# Altium PCB LOAD CONTROL_Final2.PcbDoc (part 1 of 2)
Units mil, origin at the board's own origin, x right, y up, seen from the top; angles counter-clockwise.
Board outline 2032.89 x 4209.34 mil, 2 copper layers (Top Layer, Bottom Layer); 80 components, 51 nets, 252 pads, 95 vias.
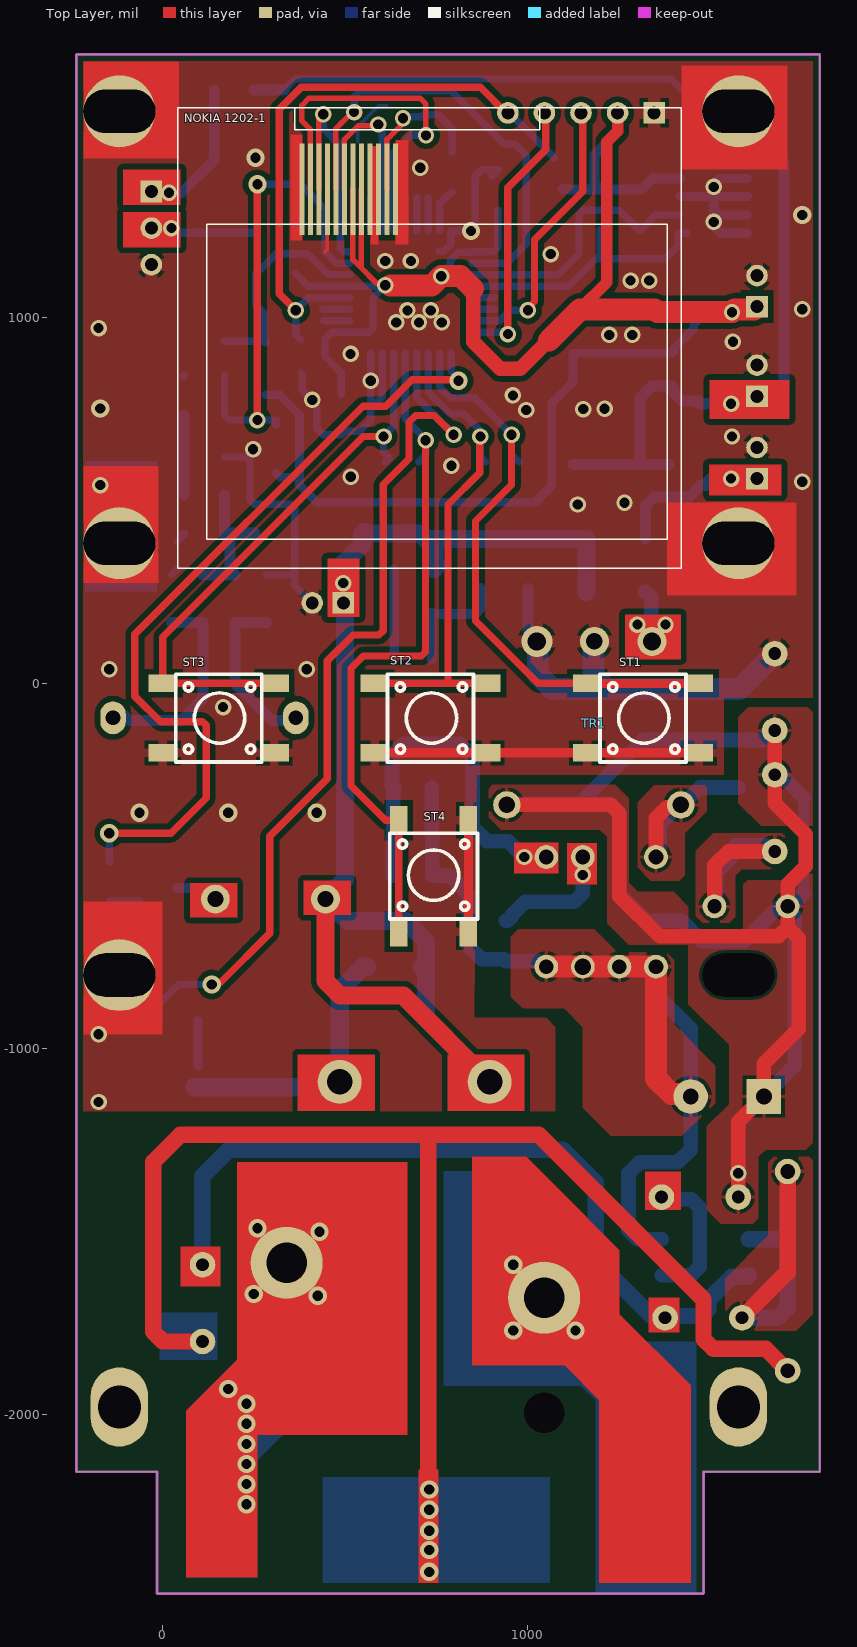
[diagram p0: Top Layer view]
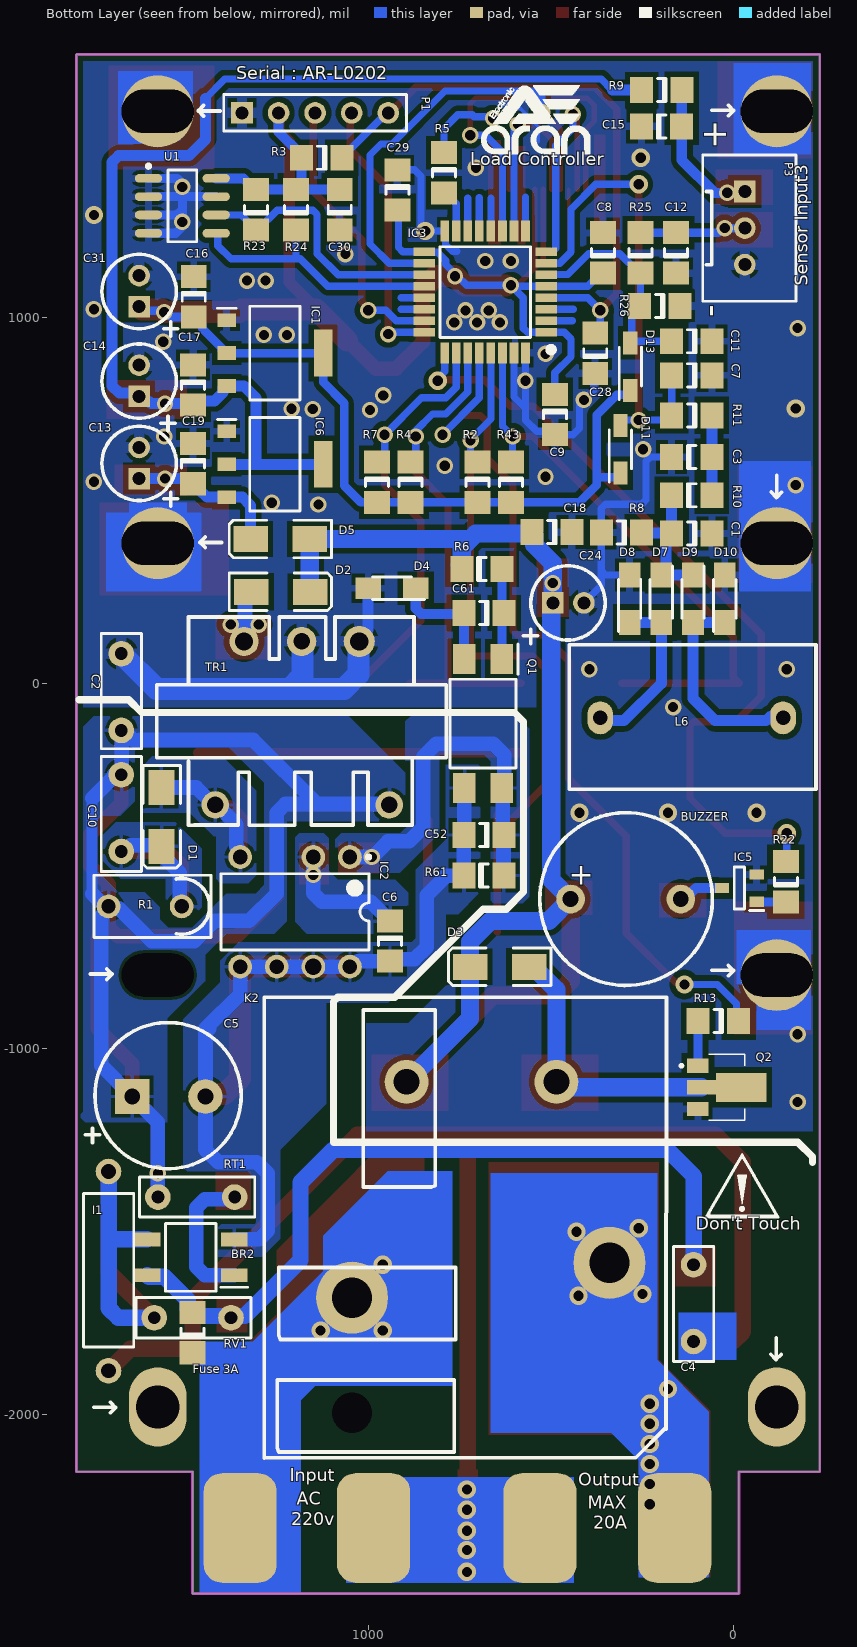
[diagram p1: Bottom Layer view, seen from below]
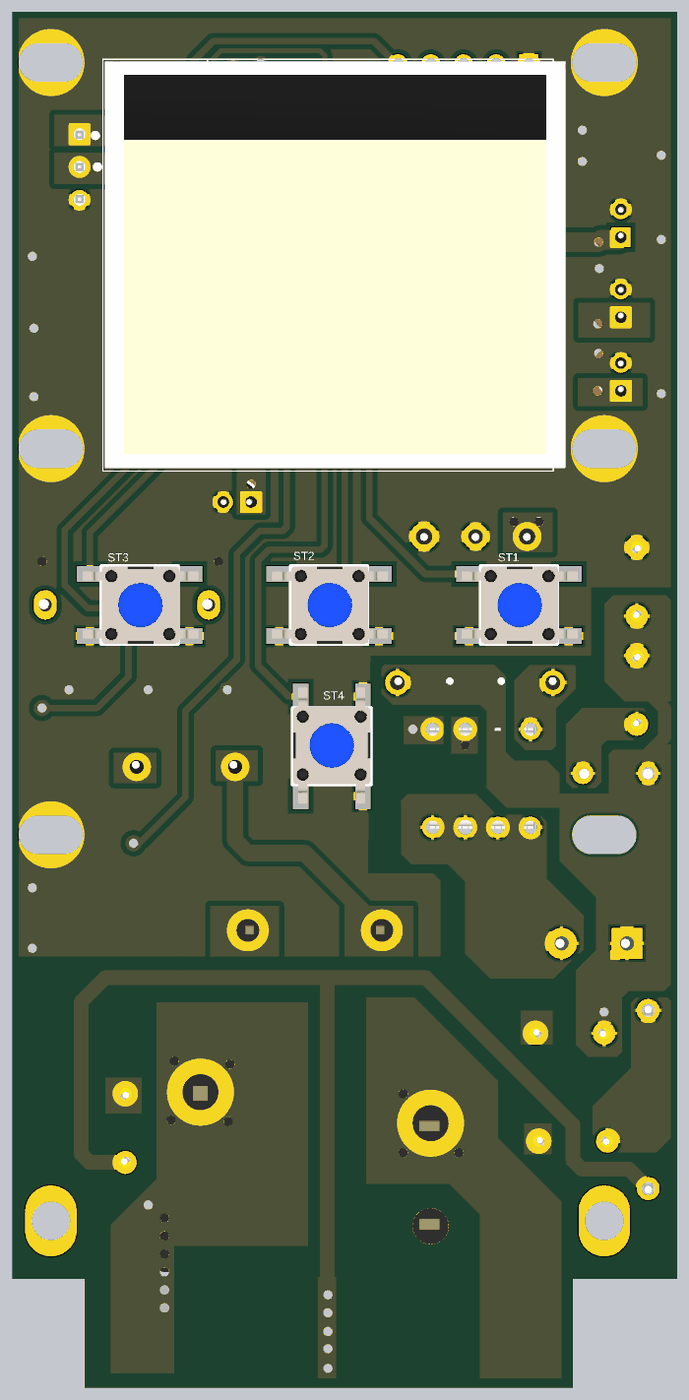
[diagram p2: 3D render of the assembled board from above, using the file's embedded part models]
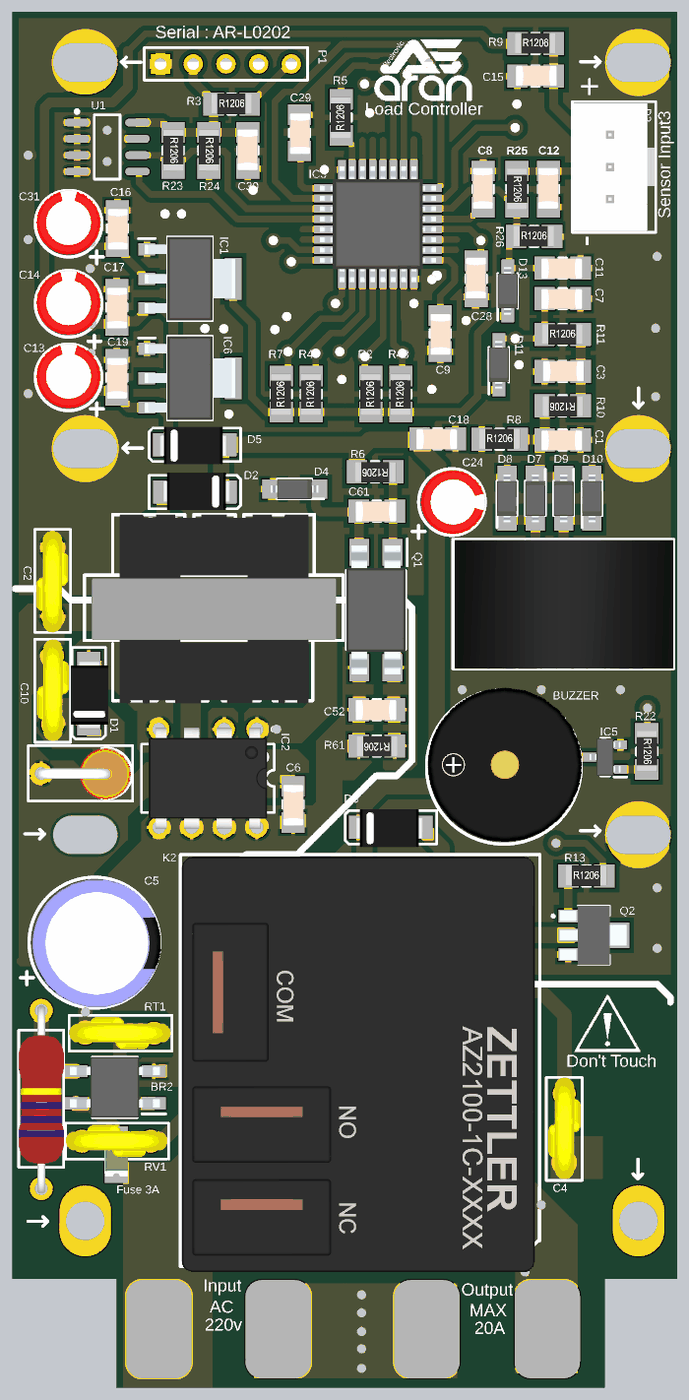
[diagram p3: 3D render of the assembled board from below, using the file's embedded part models]

## Layer stack, top to bottom
Top Solder: solder mask 0.4, Solder Resist, Dk 3.5
Top Layer: signal copper 1.4
Dielectric 1: dielectric 12.6, FR-4, Dk 4.8
Bottom Layer: signal copper 1.4
Bottom Solder: solder mask 0.4, Solder Resist, Dk 3.5

## Board outline
-14.09,-2489.41 -14.09,-2156.29 -235,-2156.29 -235,1719.93 1797.89,1719.93 1797.89,-2156.29 1480,-2156.29 1480,-2489.41

## Design rules (kind name [scope] priority, off if disabled: settings)
Clearance Clearance_15 [InNamedPolygon('GND_L02_P008')] p1: gap=15 ignorepadtopadclearanceinfootprint=TRUE
Clearance Clearance_14 [InNamedPolygon('GND_L01_P006')] p2: gap=15 ignorepadtopadclearanceinfootprint=TRUE
Clearance Clearance_13 [InNamedPolygon('GND_L01_P006')] p3: gap=15 ignorepadtopadclearanceinfootprint=TRUE
Clearance Clearance_12 [InNamedPolygon('GND_L01_P006')] p4: gap=7.87 ignorepadtopadclearanceinfootprint=FALSE
Clearance Clearance_11 [InNamedPolygon('GND_L01_P006')] p5: gap=10 ignorepadtopadclearanceinfootprint=FALSE except(0: Arc-Hole Track-Hole SMDPad-Hole THPad-Hole Via-Hole Fill-Hole Poly-Hole Region-Hole Text-Hole)
Clearance Clearance_10 [InNamedPolygon('GND_L02_P008')] p6: gap=19.68 ignorepadtopadclearanceinfootprint=FALSE
Clearance Clearance_9 [InNamedPolygon('GND_L01_P006')] p7: gap=19.68 ignorepadtopadclearanceinfootprint=FALSE
Clearance Clearance_8 [InNamedPolygon('GND_L01_P006')] p8: gap=10 ignorepadtopadclearanceinfootprint=FALSE except(0: Arc-Hole Track-Hole SMDPad-Hole THPad-Hole Via-Hole Fill-Hole Poly-Hole Region-Hole Text-Hole)
Clearance Clearance_7 [InNamedPolygon('GND_L01_P006')] p9: gap=19.68 ignorepadtopadclearanceinfootprint=FALSE
Clearance Clearance_6 [InNamedPolygon('GND_L01_P006')] p10: gap=10 ignorepadtopadclearanceinfootprint=FALSE except(0: Arc-Hole Track-Hole SMDPad-Hole THPad-Hole Via-Hole Fill-Hole Poly-Hole Region-Hole Text-Hole)
Clearance 0 [InNamedPolygon('GND_L01_P006')] p11: gap=10 ignorepadtopadclearanceinfootprint=FALSE except(0: Arc-Hole Track-Hole SMDPad-Hole THPad-Hole Via-Hole Fill-Hole Poly-Hole Region-Hole Text-Hole)
Clearance Clearance_5 [InNamedPolygon('GND_L01_P006')] p12: gap=10 ignorepadtopadclearanceinfootprint=FALSE except(0: Arc-Hole Track-Hole SMDPad-Hole THPad-Hole Via-Hole Fill-Hole Poly-Hole Region-Hole Text-Hole)
Clearance Clearance_4 [InNamedPolygon('GND-E_L02_P002')] p13: gap=20 ignorepadtopadclearanceinfootprint=FALSE
Clearance Clearance_3 [InNamedPolygon('GND_L01_P001')] p14: gap=25 ignorepadtopadclearanceinfootprint=FALSE
Clearance Clearance_2 [InNamedPolygon('GND_L02_P000')] p15: gap=20 ignorepadtopadclearanceinfootprint=FALSE
Clearance Clearance_1 [InNamedPolygon('Bottom Layer-GND')] p16: gap=14 ignorepadtopadclearanceinfootprint=FALSE
Clearance [All] p17: gap=8 ignorepadtopadclearanceinfootprint=FALSE
PolygonConnect PolygonConnect_14 [All vs IsNamedPolygon('GND_L02_P008')] p1: thpad.connectstyle=Relief thpad.reliefconductorwidth=30 thpad.reliefentries=4 thpad.polygonreliefangle="90 Angle" thpad.airgapwidth=10 smdpad.connectstyle=Relief smdpad.reliefconductorwidth=20 smdpad.reliefentries=4 smdpad.polygonreliefangle="90 Angle" smdpad.airgapwidth=10 via.connectstyle=Direct via.reliefconductorwidth=10 via.reliefentries=4 via.polygonreliefangle="90 Angle" via.airgapwidth=10
PolygonConnect PolygonConnect_13 [All vs IsNamedPolygon('GND_L01_P006')] p2: thpad.connectstyle=Relief thpad.reliefconductorwidth=35 thpad.reliefentries=4 thpad.polygonreliefangle="90 Angle" thpad.airgapwidth=10 smdpad.connectstyle=Relief smdpad.reliefconductorwidth=25 smdpad.reliefentries=4 smdpad.polygonreliefangle="90 Angle" smdpad.airgapwidth=10 via.connectstyle=Direct via.reliefconductorwidth=10 via.reliefentries=4 via.polygonreliefangle="90 Angle" via.airgapwidth=10
PolygonConnect PolygonConnect_12 [All vs IsNamedPolygon('GND_L01_P006')] p3: thpad.connectstyle=Relief thpad.reliefconductorwidth=35 thpad.reliefentries=4 thpad.polygonreliefangle="90 Angle" thpad.airgapwidth=10 smdpad.connectstyle=Relief smdpad.reliefconductorwidth=20 smdpad.reliefentries=4 smdpad.polygonreliefangle="90 Angle" smdpad.airgapwidth=10 via.connectstyle=Direct via.reliefconductorwidth=10 via.reliefentries=4 via.polygonreliefangle="90 Angle" via.airgapwidth=10
PolygonConnect PolygonConnect_11 [All vs IsNamedPolygon('GND_L01_P006')] p4: thpad.connectstyle=Relief thpad.reliefconductorwidth=20 thpad.reliefentries=4 thpad.polygonreliefangle="90 Angle" thpad.airgapwidth=10 smdpad.connectstyle=Relief smdpad.reliefconductorwidth=20 smdpad.reliefentries=4 smdpad.polygonreliefangle="90 Angle" smdpad.airgapwidth=10 via.connectstyle=Direct via.reliefconductorwidth=10 via.reliefentries=4 via.polygonreliefangle="90 Angle" via.airgapwidth=10
PolygonConnect PolygonConnect_10 [All vs IsNamedPolygon('GND_L01_P006')] p5: thpad.connectstyle=Relief thpad.reliefconductorwidth=10 thpad.reliefentries=4 thpad.polygonreliefangle="90 Angle" thpad.airgapwidth=10 smdpad.connectstyle=Relief smdpad.reliefconductorwidth=10 smdpad.reliefentries=4 smdpad.polygonreliefangle="90 Angle" smdpad.airgapwidth=10 via.connectstyle=Direct via.reliefconductorwidth=10 via.reliefentries=4 via.polygonreliefangle="90 Angle" via.airgapwidth=10
PolygonConnect PolygonConnect_9 [All vs IsNamedPolygon('GND_L01_P006')] p6: thpad.connectstyle=Direct thpad.reliefconductorwidth=10 thpad.reliefentries=4 thpad.polygonreliefangle="90 Angle" thpad.airgapwidth=10 smdpad.connectstyle=Relief smdpad.reliefconductorwidth=10 smdpad.reliefentries=4 smdpad.polygonreliefangle="90 Angle" smdpad.airgapwidth=10 via.connectstyle=Relief via.reliefconductorwidth=10 via.reliefentries=4 via.polygonreliefangle="90 Angle" via.airgapwidth=10
PolygonConnect PolygonConnect_8 [All vs IsNamedPolygon('GND_L01_P006')] p7: connectstyle=Relief reliefconductorwidth=10 reliefentries=4 polygonreliefangle="90 Angle" airgapwidth=10
PolygonConnect PolygonConnect_7 [All vs IsNamedPolygon('GND_L02_P008')] p8: connectstyle=Relief reliefconductorwidth=10 reliefentries=4 polygonreliefangle="90 Angle" airgapwidth=10
PolygonConnect PolygonConnect_6 [All vs IsNamedPolygon('GND_L02_P008')] p9: connectstyle=Direct reliefconductorwidth=10 reliefentries=4 polygonreliefangle="90 Angle" airgapwidth=10
PolygonConnect PolygonConnect_5 [All vs IsNamedPolygon('GND_L02_P008')] p10: thpad.connectstyle=Direct thpad.reliefconductorwidth=10 thpad.reliefentries=4 thpad.polygonreliefangle="90 Angle" thpad.airgapwidth=10 smdpad.connectstyle=Relief smdpad.reliefconductorwidth=10 smdpad.reliefentries=4 smdpad.polygonreliefangle="90 Angle" smdpad.airgapwidth=10 via.connectstyle=Relief via.reliefconductorwidth=10 via.reliefentries=4 via.polygonreliefangle="90 Angle" via.airgapwidth=10
PolygonConnect PolygonConnect_4 [All vs IsNamedPolygon('GND-E_L02_P002')] p11: thpad.connectstyle=Relief thpad.reliefconductorwidth=25 thpad.reliefentries=4 thpad.polygonreliefangle="90 Angle" thpad.airgapwidth=10 smdpad.connectstyle=Relief smdpad.reliefconductorwidth=15 smdpad.reliefentries=4 smdpad.polygonreliefangle="90 Angle" smdpad.airgapwidth=10 via.connectstyle=Direct via.reliefconductorwidth=10 via.reliefentries=4 via.polygonreliefangle="90 Angle" via.airgapwidth=10
PolygonConnect PolygonConnect_3 [All vs IsNamedPolygon('GND_L01_P001')] p12: thpad.connectstyle=Relief thpad.reliefconductorwidth=25 thpad.reliefentries=4 thpad.polygonreliefangle="90 Angle" thpad.airgapwidth=10 smdpad.connectstyle=Relief smdpad.reliefconductorwidth=25 smdpad.reliefentries=4 smdpad.polygonreliefangle="90 Angle" smdpad.airgapwidth=10 via.connectstyle=Direct via.reliefconductorwidth=10 via.reliefentries=4 via.polygonreliefangle="90 Angle" via.airgapwidth=10
PolygonConnect PolygonConnect_2 [All vs IsNamedPolygon('GND_L02_P000')] p13: thpad.connectstyle=Relief thpad.reliefconductorwidth=25 thpad.reliefentries=4 thpad.polygonreliefangle="90 Angle" thpad.airgapwidth=10 smdpad.connectstyle=Relief smdpad.reliefconductorwidth=10 smdpad.reliefentries=4 smdpad.polygonreliefangle="90 Angle" smdpad.airgapwidth=15 via.connectstyle=Direct via.reliefconductorwidth=10 via.reliefentries=4 via.polygonreliefangle="90 Angle" via.airgapwidth=10
PolygonConnect PolygonConnect_1 [All vs IsNamedPolygon('Bottom Layer-GND')] p14: thpad.connectstyle=Relief thpad.reliefconductorwidth=25 thpad.reliefentries=4 thpad.polygonreliefangle="90 Angle" thpad.airgapwidth=10 smdpad.connectstyle=Relief smdpad.reliefconductorwidth=15 smdpad.reliefentries=4 smdpad.polygonreliefangle="90 Angle" smdpad.airgapwidth=10 via.connectstyle=Direct via.reliefconductorwidth=10 via.reliefentries=4 via.polygonreliefangle="90 Angle" via.airgapwidth=10
PolygonConnect [All] p15: connectstyle=Relief reliefconductorwidth=10 reliefentries=4 polygonreliefangle="90 Angle" airgapwidth=10
RoutingVias [All] p1: holewidth=28 width=50 viastyle="Through Hole" minholewidth=28 minwidth=50 maxholewidth=28 maxwidth=50
SolderMaskExpansion [All] p1: expansion=4
Width [All] p1: maxlimit=100 minlimit=10 preferedwidth=10
30 further rules are at their usual default settings.

## Classes and differential pairs
polygon class PolygonClass_1: GND_L01_P006

## Components (designator, comment, footprint, x,y, rotation, side; value= is the part's Value field where it differs from the comment)
BR2 "HD06-T" SOP250P700X270-4N 1485,-1570 r0 bottom
BUZZER "Buzzer" BUZZER 301.5,-593.63 r90 bottom (schematic designator Buzzer)
C1 "100nf" C1206 117.6,407.66 r270 bottom value=10PF
C2 "2.3nf" "VAR 5MM" 1675,1.18 r180 bottom value=100pF
C3 "100nf" C1206 112.16,621.43 r90 bottom value=10PF
C4 "2.3nf" "VAR 5MM" 110,-1720 r0 bottom value=100pF
C5 "400V" "RADIAL 12MM" 1540,-1125 r90 bottom value=10uF
C6 "100nf" C1206 937.66,-707.6 r180 bottom value=10PF
C7 "100nf" C1206 117.6,840 r270 bottom value=10PF
C8 "100nf" C1206 360,1180 r0 bottom value=10PF
C9 "100nf" C1206 487,732.64 r180 bottom value=10PF
C10 "2.3nf" "VAR 5MM" 1675,-380 r0 bottom value=100pF
C11 "100nf" C1206 117.6,933.12 r270 bottom value=10PF
C12 "100nf" C1206 160,1180 r0 bottom value=10PF
C13 "35v - 100uf" "RADIAL 5MM" 1626.28,600 r270 bottom value=1500uF
C14 "35v - 100uf" "RADIAL 5MM" 1626.28,825 r270 bottom value=1500uF
C15 "100nf" C1206 195,1525 r90 bottom value=10PF
C16 "100NF" C1206 1474.54,1054.25 r180 bottom value=10PF
C17 "100NF" C1206 1476.87,812.99 r180 bottom value=10PF
C18 "100NF" C1206 500.12,411.33 r270 bottom value=10PF
C19 "100NF" C1206 1476.71,598.21 r180 bottom value=10PF
C24 "16v - 470uf" "RADIAL 5MM" 455,220 r0 bottom value=1500uF
C28 "100nf" C1206 381.35,905.51 r0 bottom value=10PF
C29 "100nf" C1206 917.13,1346.52 r180 bottom value=10PF
C30 "100nf" C1206 1080,1298.04 r0 bottom value=10PF
C31 "35v - 100uf" "RADIAL 5MM" 1626.28,1070 r270 bottom value=1500uF
C52 "1nF" C1206 685.98,-417.4 r270 bottom value=10PF
C61 "100nf" C1206 685.98,190 r270 bottom value=10PF
D1 "4007" SMA 1565,-365 r180 bottom
D2 "4007" SMA 1240,250 r90 bottom
D3 "4007" SMA 640,-775 r270 bottom
D4 "zener 11v" SOD3716X135N#1 935,260 r0 bottom
D5 "4007" SMA 1240,395 r270 bottom
D7 "1N4148W-E3-08" SOD3716X135N#1 198.33,231.18 r270 bottom
D8 "1N4148W-E3-08" SOD3716X135N#1 285,231.18 r90 bottom
D9 "1N4148W-E3-08" SOD3716X135N#1 111.67,231.18 r270 bottom
D10 "1N4148W-E3-08" SOD3716X135N#1 25,231.18 r90 bottom
D11 "1N4148W-E3-08" SOD3716X135N#2 310,640 r90 bottom
D13 "1N4148W-E3-08" SOD3716X135N#2 282.88,865.89 r90 bottom
"Fuse 3A" "Fuse 1" FUSE1206 1477.5,-1775 r180 bottom
IC1 "AMS1117-3.3V" SOT229P700X180-4N 1255,903.15 r180 bottom
IC2 "TNY176PN" DIP8 1200,-625 r270 bottom
IC3 "STM32F030K6T6TR" QFP80P900X900X160-32N 680,1070 r0 bottom
IC5 "MMBT3906" SOT95P240X120-3N -15,-560 r0 bottom
IC6 "AMS1117-5V" SOT229P700X180-4N 1255,599.1 r180 bottom
K2 "RELAY-SPDT" T91 1060,-1555 r0 bottom
l1 "1mH" "inductor 0.25w" 1710,-1650 r180 bottom value=10mH (schematic designator L1)
L6 "0" ZMC 110.24,-94.49 r0 bottom value=300uH
"NOKIA 1202-1" "LCD2" "LCD NOKIA 1202" 737.49,944.11 r0 top
P1 "Header 5" HDR1X5 1345,1560.09 r180 bottom
P3 "Header 3" 3PIN -30,1245 r270 bottom
Q1 "TPC817S1A_RAG" SOP259P1005X368-4N 685.98,-110 r270 bottom
Q2 "2SC2873-Y_F_" 2SC5819TE12LF 68.58,-1105 r270 bottom
R1 "0.22 oh _ 5%" "RES 2W H" 1390,-625 r270 bottom value=0.22oh
R2 "Res Semi" R1206 698.77,547.44 r180 bottom value=2.2K
R3 "Res Semi" R1206 1130,1435 r270 bottom value=1k
R4 "Res Semi" R1206 881.64,547.44 r180 bottom value=2.2K
R5 "Res Semi" R1206 790.24,1393.73 r180 bottom value=1k
R6 "1206" R1206 685.98,315 r90 bottom value=100
R7 "Res Semi" R1206 973.08,547.44 r180 bottom value=2.2K
R8 "Res Semi" R1206 310,410 r270 bottom value=100
R9 "Res Semi" R1206 200,1620 r270 bottom value=3.3k
R10 "Res Semi" R1206 112.16,516.68 r90 bottom value=1k
R11 "Res Semi" R1206 117.6,730.3 r270 bottom value=1k
R13 "Res Semi" R1206 45,-926 r270 bottom value=1k
R22 "Res Semi" R1206 -140,-540 r0 bottom value=1k
R23 "Res Semi" R1206 1308.99,1298.04 r0 bottom value=1k
R24 "Res Semi" R1206 1199.91,1298.04 r0 bottom value=1k
R25 "Res Semi" R1206 257.34,1180 r0 bottom value=3.3k
R26 "Res Semi" R1206 205,1030 r270 bottom value=3.3k
R43 "Res Semi" R1206 607.33,547.44 r180 bottom value=2.2K
R61 "330k" R1206 680.54,-523.33 r90 bottom value=10K
RT1 "5D-9" "VAR 5MM" 1445,-1405 r270 bottom value=150k
RV1 "VDR - 14D561k" "VAR 5MM" 1455,-1735 r270 bottom
ST1 "SW-PB" "PUSH BOTTOM 6*6" 1316.95,-90 r90 top
ST2 "SW-PB" "PUSH BOTTOM 6*6" 735.98,-90 r90 top
ST3 "SW-PB" "PUSH BOTTOM 6*6" 156.44,-90 r90 top
ST4 "SW-PB" "PUSH BOTTOM 6*6" 736.87,-524.69 r180 top
TR1 "Trans 15 D 16" EE20 1222.39,-92.39 r0 top
U1 "Serial EEPROM(24C04)" SO8_L 1508.17,1305.9 r180 bottom

## Footprints (in the part's own frame and the unit in brackets; to place one, negate y for a bottom-side part, rotate by r counter-clockwise, add the part's x,y. Pads: shape width x height; smd on the part's side, far side on the other; paste and mask are expansions set on the pad)
2SC5819TE12LF [mm]
  rect 1x1.5 smd: 1(-1.5,-0.75) 3(1.5,-0.75)
  rect 1x2 smd: 2(0,-0.5)
  rect 2x3.5 smd: 4(0,2.25)
  silkscreen extent -2.3,-2 2.3,2.5, body extent -2.3,-1.4 2.3,3.8, height 1.1
3PIN [mm]
  rect 1.5x1.5 hole 0.9: 1(-2.54,0)
  round 1.5 hole 0.9: 2(0,0) 3(2.54,0)
  silkscreen extent -5.08,-2.92 5.08,3.56, body extent -4.95,-2.9 4.95,3.49, height 7
BUZZER [mm]
  round 2 hole 1.1: 1(0.092,3.675) 2(0.092,-3.975)
  silkscreen extent -5.91,-6.17 6.09,5.83, body extent -5.75,-6.25 6.25,5.75, height 9.5
C1206 [mm]
  rect 1.8x1.6 smd: 1(-0.059,1.469) 2(-0.059,-1.331)
  silkscreen extent -0.86,-0.23 0.74,0.37, body extent -0.83,-1.59 0.77,1.61, height 0.81
DIP8 [mil]
  round 65 hole 40: 1(-150,150) 2(-150,50) 4(-150,-150) 5(150,-150) 6(150,-50) 8(150,150)
  round 65 hole 45: 7(150,50)
  silkscreen extent -155,-203 104,206, body extent -155,-181 155,181, height 152
EE20 [mil]
  round 75 hole 45: 1(195.62,-240) 4(-280,-240)
  round 85 hole 50: 5(-198.08,207.01)
  round 80 hole 45: 6(-40.6,207.01)
  round 80 hole 50: 7(116.88,207.01)
  body extent -415,-304 333,274, height 104
FUSE1206 [mm]
  rect 1.8x1.6 smd: 1(-0.077,-1.416) 2(-0.077,1.384)
  silkscreen extent -0.88,-0.32 0.72,0.28, body extent -0.99,-1.74 0.85,1.76, height 0.5
HDR1X5 [mm] "Connector; Header; 5 Position"
  rect 1.5x1.5 hole 0.9: 1(0,0)
  round 1.5 hole 0.9: 2(2.54,0) 3(5.08,0) 4(7.62,0) 5(10.16,0)
  silkscreen extent -1.27,-1.27 11.43,1.27
"inductor 0.25w" [mil]
  round 70 hole 40: 1(0,-230) 2(0,315)
  silkscreen extent -69,-165 69,255, body extent -69,-245 69,330, height 89
"LCD NOKIA 1202" [mm]
  rect 0.35x6.35 smd: 1(-9.039,10.344) 2(-8.448,10.344) 3(-7.857,10.344) 4(-7.267,10.344) 5(-6.676,10.344) 6(-6.085,10.344) 7(-5.494,10.344) 8(-4.903,10.344) 9(-4.312,10.344) 10(-3.721,10.344) 11(-3.13,10.344) 12(-2.539,10.344)
  silkscreen extent -17.68,-15.99 17.32,16.01, body extent -17.52,-15.75 18.28,15.85, height 2.51
"PUSH BOTTOM 6*6" [mm]
  rect 1.2x2 smd: 1(-2.54,3.937) 1(-2.54,-3.81) 2(2.286,-3.81) 2(2.286,3.937)
  silkscreen extent -3.18,-2.92 2.92,3.05, body extent -3.13,-4.5 2.87,4.5, height 4.2
QFP80P900X900X160-32N [mm]
  rect 1.475x0.6 smd: 1(-4.238,2.8) 2(-4.238,2) 3(-4.238,1.2) 4(-4.238,0.4) 5(-4.238,-0.4) 6(-4.238,-1.2) 7(-4.238,-2) 8(-4.238,-2.8) 17(4.238,-2.8) 18(4.238,-2) 19(4.238,-1.2) 20(4.238,-0.4) 21(4.238,0.4) 22(4.238,1.2) 23(4.238,2) 24(4.238,2.8)
  rect 0.6x1.475 smd: 9(-2.8,-4.238) 10(-2,-4.238) 11(-1.2,-4.238) 12(-0.4,-4.238) 13(0.4,-4.238) 14(1.2,-4.238) 15(2,-4.238) 16(2.8,-4.238) 25(2.8,4.238) 26(2,4.238) 27(1.2,4.238) 28(0.4,4.238) 29(-0.4,4.238) 30(-1.2,4.238) 31(-2,4.238) 32(-2.8,4.238)
  silkscreen extent -4.77,-3.15 3.15,4.2, body extent -4.5,-4.5 4.5,4.5, height 1.6
R1206 [mm]
  rect 1.8x1.6 smd: 1(-0.059,1.469) 2(-0.059,-1.331)
  silkscreen extent -0.86,-0.23 0.74,0.37, body extent -0.89,-1.56 0.71,1.64, height 0.85
"RADIAL 5MM" [mm]
  round 1.5 hole 0.9: 1(-1.143,0)
  rect 1.5x1.5 hole 0.9: 2(1.016,0)
  silkscreen extent -2.62,-2.59 2.54,2.59, body extent -2.62,-2.5 2.37,2.5, height 9
"RADIAL 12MM" [mm]
  rect 2.4x2.4 hole 1.1: 1(-0.127,2.667)
  round 2.4 hole 1.1: 2(-0.127,-2.413)
  silkscreen extent -5.14,-4.9 5.01,5.26, body extent -5.13,-5 4.87,5, height 15
"RES 2W H" [mm]
  round 1.65 hole 1: 1(-0.381,-8.128) 2(-0.381,-3.048)
  silkscreen extent -2.54,-9.14 1.78,-1.02, body extent -2.35,-8.5 1.65,-1.15, height 13.38
SMA [mm]
  rect 1.8x2.4 smd: 1(0.006,-2.065) 2(0.006,2.035)
  silkscreen extent -1.29,-3.56 1.31,3.56, body extent -1.4,-2.77 1.52,2.51, height 2.41
SO8_L [mm] "SOIC, 8-Leads, Body 4.9x3.9mm, Pitch 1.27mm, IPC High Density"
  oval 1.9x0.6 smd: 1(-2.35,1.905) 2(-2.35,0.635) 3(-2.35,-0.635) 4(-2.35,-1.905) 5(2.35,-1.905) 6(2.35,-0.635) 7(2.35,0.635) 8(2.35,1.905)
  silkscreen extent -2.47,-2.5 1,2.88, body extent -2,-2.5 2,2.5, height 1.75
SOD3716X135N#1 [mm]
  rect 1.75x1.5 smd: 1(-1.65,0) 2(1.65,0)
  silkscreen extent -2.27,-0.77 1.35,0.77, body extent -1.85,-0.77 1.85,0.77, height 1.35
SOD3716X135N#2 [mm]
  rect 1.6x1 smd: 1(-1.65,0) 2(1.65,0)
  silkscreen extent -2.28,-0.77 1.35,0.77, body extent -1.85,-0.78 1.85,0.78, height 1.35
SOP250P700X270-4N [mm]
  rect 1.85x0.95 smd: 1(-3.025,1.25) 2(-3.025,-1.25) 3(3.025,-1.25) 4(3.025,1.25)
  silkscreen extent -3.95,-2.35 1.75,2.35, body extent -3.5,-2.35 3.5,2.35, height 2.7
SOP259P1005X368-4N [mm]
  rect 2.1x1.55 smd: 1(-4.475,1.295) 2(-4.475,-1.295) 3(4.475,-1.295) 4(4.475,1.295)
  silkscreen extent -5.52,-2.3 3.08,2.42, body extent -5.02,-2.3 5.02,2.3, height 3.68
SOT95P240X120-3N [mm]
  rect 1x0.7 smd: 1(-1.2,0.95) 2(-1.2,-0.95) 3(1.2,0)
  silkscreen extent -1.7,-1.46 0.35,1.55, body extent -1.2,-1.46 1.2,1.46, height 1.2
SOT229P700X180-4N [mm]
  rect 1.3x0.95 smd: 1(-3.35,2.29) 2(-3.35,0) 3(-3.35,-2.29)
  rect 1.3x3.25 smd: 4(3.35,0)
  silkscreen extent -4,-3.25 1.75,3.25, body extent -3.5,-3.25 3.5,3.25, height 1.8
T91 [mil]
  round 196.85 hole 110.24: 1(-720,30) 3(-15.93,125)
  round 0 hole 110.24: 2(-15.93,440)
  round 120 hole 70: 4(-575,-465) 5(-165,-465)
  silkscreen extent -876,-697 224,563, body extent -860,-690 220,580, height 1100
"VAR 5MM" [mil]
  round 70 hole 35: 1(0,-130) 2(0,80)
  silkscreen extent -55,-180 55,135, body extent -50,-180 48,131, height 467
ZMC [mil]
  oval 70x90 hole 40: 1(-245,0) 2(255,0)
  silkscreen extent -335,-200 340,195, body extent -334,-199 335,199, height 53

## Part data
BR2: "Bridge Rectifier", Manufacturer_Name="Diodes Inc.", Mouser Part Number=621-HD06T, RS Part Number=7385033, Allied_Number=70438301, Allied Price/Stock=https://www.alliedelec.com/diodes-inc-hd06-t/70438301/, Datasheet Link=https://www.diodes.com/assets/Datasheets/ds17003.pdf, Height=2.7mm, Manufacturer_Part_Number=HD06-T, Mouser Price/Stock=https://www.mouser.com/Search/Refine.aspx?Keyword=621-HD06T, RS Price/Stock=https://uk.rs-online.com/web/p/products/7385033
C1 C3 C6 C7 C8 C9 C11 C12 C15 C16 C17 C18 C19 C28 C29 C30 C52 C61: library part "Cap Semi", "Capacitor (Semiconductor SIM Model)", LatestRevisionDate=29-May-2009, LatestRevisionNote="IPC-7351 Footprint Added.", PackageDescription="Chip Capacitor", PackageReference=C1206, Published=8-Jun-2000, Publisher="Altium Limited"
C2 C4 C10: library part Cap, "Capacitor - SMD", LatestRevisionDate=17-Jul-2002, LatestRevisionNote="Re-released for DXP Platform.", PackageDescription="Radial Cap, Thru-Hole; 2 Leads; 0.3 in Pin Spacing", PackageReference=RAD-0.3, Published=8-Jun-2000, Publisher="Altium Limited"
C5: library part CAP_22uF_400V
C13 C14 C24 C31: library part "CAP 470uF 16V", "Electrolytic Capacitor"
D1 D2 D3 D4 D5: library part 1N5819HW-7-F, "Diode", Manufacturer_Name="Diodes Inc.", Mouser Part Number=621-1N5819HW-F, RS Part Number=7082197P, Allied Price/Stock=http://www.alliedelec.com/diodes-inc-1n5819hw-7-f/70437201/, Allied_Number=70437201, Datasheet Link=http://www.diodes.com/_files/datasheets/ds30217.pdf, Height=1.45mm, Manufacturer_Part_Number=1N5819HW-7-F, Mouser Price/Stock=https://www.mouser.com/Search/Refine.aspx?Keyword=621-1N5819HW-F, RS Price/Stock=http://uk.rs-online.com/web/p/products/7082197P
D7 D8 D9 D10 D11 D13: "Diode", Manufacturer_Name=Vishay, Mouser Part Number=78-1N4148W-E3-08, Arrow Part Number=1N4148W-E3-08, Arrow Price/Stock=https://www.arrow.com/en/products/1n4148w-e3-08/vishay?region=nac, Datasheet Link=http://www.vishay.com/docs/85748/1n4148w.pdf, Height=1.35mm, Manufacturer_Part_Number=1N4148W-E3-08, Mouser Price/Stock=https://www.mouser.co.uk/ProductDetail/Vishay-Semiconductors/1N4148W-E3-08?qs=bTzheeSci6TVjpxfjjRVMw%3D%3D
"Fuse 3A": "Fuse", LatestRevisionDate=17-Jul-2002, LatestRevisionNote="Re-released for DXP Platform.", PackageDescription="Thru-Hole; 2 Leads", PackageReference=PIN-W2/E2.8, Published=8-Jun-2000, Publisher="Altium Limited"
IC1 IC6: library part AMS1117-3.3, "Integrated Circuit", Manufacturer_Name="Advanced Monolithic Systems", Datasheet Link=http://www.advanced-monolithic.com/pdf/ds1117.pdf, Height=1.8mm, Manufacturer_Part_Number=AMS1117-3.3
IC2: library part TNY278PN, "Integrated Circuit", Manufacturer_Name="Power Integrations", Mouser Part Number=869-TNY278PN, RS Part Number=0533721, Datasheet Link=https://www.power.com/sites/default/files/product-docs/tny274-280.pdf, Height=4.06mm, Manufacturer_Part_Number=TNY278PN, Mouser Price/Stock=https://www.mouser.com/Search/Refine.aspx?Keyword=869-TNY278PN, RS Price/Stock=http://uk.rs-online.com/web/p/products/0533721
IC3: "Integrated Circuit", Manufacturer_Name=STMicroelectronics, Mouser Part Number=511-STM32F030K6T6TR, Arrow Part Number=STM32F030K6T6TR, Arrow Price/Stock=https://www.arrow.com/en/products/stm32f030k6t6tr/stmicroelectronics, Datasheet Link=http://www.st.com/content/ccc/resource/technical/document/datasheet/a4/5d/0b/0e/87/c4/4d/71/DM00088500.pdf/files/DM00088500.pdf/jcr:content/translations/en.DM00088500.pdf, Height=1.6mm, Manufacturer_Part_Number=STM32F030K6T6TR, Mouser Price/Stock=https://www.mouser.co.uk/ProductDetail/STMicroelectronics/STM32F030K6T6TR/?qs=9MuLHSklicort60U4QZudQ%3D%3D
IC5: "Transistor", Manufacturer_Name=onsemi, Mouser Part Number=512-MMBT3906, Arrow Part Number=MMBT3906, Arrow Price/Stock=https://www.arrow.com/en/products/mmbt3906/on-semiconductor, Datasheet Link=http://akizukidenshi.com/download/ds/fairchild/2N3904_MMBT3904_PZT3904.pdf, Height=1.2mm, Manufacturer_Part_Number=MMBT3906, Mouser Price/Stock=https://www.mouser.co.uk/ProductDetail/ON-Semiconductor-Fairchild/MMBT3906?qs=UMEuL5FsraBPiZDsobnR3A%3D%3D
l1 L6: library part Inductor, "Inductor", Code_IEC=1005, Code_JEITA=0402, LatestRevisionDate=29-May-2009, LatestRevisionNote="IPC-7351 Footprint Added.", PackageDescription="Chip Inductor", PackageReference=0402-A, Published=8-Jun-2000, Publisher="Altium Limited"
"NOKIA 1202-1": library part "NOKIA 1202"
P1: "Header, 5-Pin", LatestRevisionDate=17-Jul-2002, LatestRevisionNote="Re-released for DXP Platform.", Publisher="Altium Limited"
P3: "Header, 3-Pin", LatestRevisionDate=17-Jul-2002, LatestRevisionNote="Re-released for DXP Platform.", Publisher="Altium Limited"
Q1: "Transistor", Manufacturer_Name="Taiwan Semiconductor", Manufacturer_Part_Number="TPC817S1A RAG", Mouser Part Number=821-TPC817S1ARAG, Datasheet Link=http://www.taiwansemi.com/products/datasheet/TPC817%20SERIES_C1612.pdf, Height=3.68mm, Mouser Price/Stock=https://www.mouser.com/Search/Refine.aspx?Keyword=821-TPC817S1ARAG
Q2: "Transistor BJT NPN", Manufacturer_Name=Toshiba, Manufacturer_Part_Number=2SC2873-Y(F), Datasheet Link=http://toshiba.semicon-storage.com/info/docget.jsp?did=20773&prodName=2SC2873, Height=1mm
R1: library part Res1, "Resistor - Deep", LatestRevisionDate=17-Jul-2002, LatestRevisionNote="Re-released for DXP Platform.", PackageDescription="Axial Device, Thru-Hole; 2 Leads; 0.3 in Pin Spacing", PackageReference=AXIAL-0.3, Published=8-Jun-2000, Publisher="Altium Limited"
R2 R3 R4 R5 R7 R8 R9 R10 R11 R13 R22 R23 R24 R25 R26 R43: "Semiconductor Resistor", LatestRevisionDate=17-Jul-2002, LatestRevisionNote="Re-released for DXP Platform.", PackageReference=AXIAL-0.5, Published=8-Jun-2000, Publisher="Altium Limited"
R6 R61: library part Res3, "Resistor", LatestRevisionDate=29-May-2009, LatestRevisionNote="IPC-7351 Footprint Added.", PackageDescription="Chip Resistor", PackageReference=J1-0603, Published=8-Jun-2000, Publisher="Altium Limited"
RT1: library part Res1, "NTC", LatestRevisionDate=17-Jul-2002, LatestRevisionNote="Re-released for DXP Platform.", PackageDescription="Axial Device, Thru-Hole; 2 Leads; 0.3 in Pin Spacing", PackageReference=AXIAL-0.3, Published=8-Jun-2000, Publisher="Altium Limited"
RV1: library part "Res Varistor", "Varistor (Voltage-Sensitive Resistor)", Code_IPC=RESC2012, LatestRevisionDate=29-May-2009, LatestRevisionNote="IPC-7351 Footprint Added.", PackageDescription="Chip Resistor 0805 Case Size", PackageReference=6-0805, PackageVersion=Mar-2003, Published=24-Mar-1999, Publisher="Altium Limited"
ST1 ST2 ST3 ST4: "Switch", LatestRevisionDate=17-Jul-2002, LatestRevisionNote="Re-released for DXP Platform.", PackageDescription="Switch; 2 Leads", PackageReference=SPST-2, Published=24-Mar-1999, Publisher="Altium Limited"
U1: library part AT24C512, "EEPROM"
BUZZER: ComponentLinkURL=www.picpars.com, Designer="Seyed Mohsen Ghasemain"

## Free pads (board coordinates)
  rrect50% 200x300 smd far side: 4(161.69,-2310) 4(530,-2310) 4(985,-2310) 4(1350,-2310)
  oval 157.48x216.54 hole 118.11: ""(-117.48,-1978.93) ""(1575.43,-1978.93)
  round 196.85 hole 118.11 slot 196.85 at 0 deg: ""(-117.48,-797.83) ""(-117.48,383.27) ""(-117.48,1564.38) ""(1575.43,383.27) ""(1575.43,1564.38)
  round 0 hole 118.11 slot 196.85 at 0 deg: ""(1575.43,-797.83)

## Via types
v1: diameter 45, hole 28, Top Layer to Bottom Layer, tented both sides, 65 vias
v2: diameter 50, hole 28, Top Layer to Bottom Layer, tented both sides, 30 vias

## Nets (pads, with @x,y where several pads share a name; then routed paths per layer and width w, separated by ;. In a path a pad name is that pad's centre, name@x,y a point inside that pad or via, vN(x,y) a via of type N, cw(c..) or ccw(c..) an arc to the next point about the centre after c; other vN are vias at no path point)
amper: C7.2 D11.2 IC3.7 R11.2 | length 1330.9
  Top Layer w20: v1(260,720) v2(260,1365)
  Bottom Layer w20: C7.2 R11.2 182.64,720 v1(260,720) 313.23,720 310,716.77 D11.2 ; v2(260,1365) 377.23,1365 445,1297.23 445,1180 476.26,1148.74 IC3.7
backlight: IC3.15 R5.2 | length 120.8
  Bottom Layer w20: IC3.15 758.74,1311.44 788.63,1341.33 R5.2
buzzer: IC3.25 R22.2 | length 2237.2
  Top Layer w20: v2(-145,-410) 23.49,-410 119.7,-313.78 119.7,-115 109.7,-105 -5,-105 -75,-35 -75,134.47 548.65,758.13 610.88,758.13 682.76,830 807.03,830 v2(809.73,827.29)
  Bottom Layer w20: v2(-145,-410) -145,-484.94 R22.2 ; IC3.25 790.24,852.87 809.73,833.37 v2(809.73,827.29)
CO: K2.1 pad.4@161.69,-2310 | length 798.6
  Bottom Layer w100: pad.4@180,-2295 180,-2095 340,-1935 K2.1 ; pad.4@180,-2339.55 pad.4@180,-2317.28
  other v2: 230,-2245 230,-2190 230,-2135 230,-2080 230,-2025 230,-1970 180,-1930 425,-1675 250,-1670 430,-1500 260,-1490.05
GND: "NOKIA 1202-1.1" "NOKIA 1202-1.4" "NOKIA 1202-1.9" "NOKIA 1202-1.10" "NOKIA 1202-1.12" C1.1 C2.2 C3.1 C7.1 C8.2 C9.2 C11.1 C12.1 C13.1 C14.1 C15.1 C16.1 C17.1 C18.1 C19.1 C24.1 C28.1 C29.1 C30.1 C31.1 D4.2 D8.2 D10.2 IC1.1 IC3.16 IC3.31 IC3.32 IC5.2 IC6.1 P1.1 P3.3 pad.@1575.43,383.27 pad.@1575.43,1564.38 pad.@-117.48,383.27 pad.@-117.48,1564.38 pad.@-117.48,-797.83 Q2.3 R8.2 R26.1 ST1.1 ST2.1 ST3.1 ST4.1 TR1.5 TR1.6 U1.1 U1.2 U1.3 U1.4 U1.7 | length 5316.2
  Top Layer w10: 445.47,1180 451.41,1185.93 451.41,1351.36
  Top Layer w25: ST4.1@836.87,-679.69 ST4.1@836.87,-374.69 ; ST2.1@885.98,-190 580.98,-190 1161.95,-190 ST1.1@1466.95,-190
  Bottom Layer w10: 534.77,1481.67 534.77,1522.43 559.97,1547.63 559.97,1547.9 591.45,1579.38 613.55,1579.38
  Bottom Layer w20: D10.2 D10.2@41.04,312.18 ; C1.1@41.04,387.34 59.76,406.06 C1.1 C1.1@50,410 ; C7.1@57.43,840 C7.1 ; C3.1 228.28,619.1 240,607.38 240,501.72 251.72,490 350.68,490 362.4,478.28 R8.2 362.4,307.85 ; D8.2 350.68,296.14 362.4,307.85 ; C28.1 382.95,843.73 382.95,802.2 422.23,762.92 422.23,698.02 440,680.24 C9.2 498.35,689.25 539.26,689.25 569.76,719.76 569.76,751.44 ; C24.1 362.4,267.6 362.4,307.85 ; IC3.32 569.76,751.44 ; IC3.31 601.26,782.93 569.76,751.44 ; 757.5,1181.28 769.47,1181.28 788.55,1200.36 788.55,1235.17 IC3.16 v2(843.93,1236.85) 855.65,1248.57 855.65,1386.83 873.18,1404.36 C29.1 C29.1@902.2,1387.11
  Bottom Layer w25: U1.7 1508.17,1330.9 ; U1.4 1526.64,1230.9 1508.17,1249.38 1508.17,1295.55 ; U1.3 1522.82,1280.9 1508.17,1295.55 ; U1.2 1508.17,1330.9 ; U1.1 1522.81,1380.9 1508.17,1366.26 1508.17,1330.9 ; 1508.17,1295.55 1508.17,1330.9
  Bottom Layer w30: D4.2 999.96,145.73 TR1.5@1021.92,123.77
  Bottom Layer w60: TR1.5@1021.92,123.77 1021.92,117.01 1026.7,112.22 1026.7,24.48 1066.18,-15 1214.54,-15 ; TR1.6@1179.4,117.01 1179.4,20.15 1214.54,-15 ; C2.2 1578.82,-15 1214.54,-15
  other v1: -174.31,-1145 -174.31,-960 165.99,-65 -145,38.62 395.01,38.62 1135.9,489.03 1263.93,494.12 -169.56,542.27 1750,551.52 515,564.78 790.48,595 248.2,640 1557.93,675 995,747.54 1151.45,750.01 1209.37,750.97 410,775.14 958.93,787.46 569.76,827.29 514.83,900.77 1560.43,934.27 1222.12,952.94 1285.15,952.94 -174.31,971.48 639.67,987.09 701.99,987.09 764.31,987.09 670.3,1019.79 733.77,1019.79 1750,1022.76 1280.63,1101.4 1331.36,1101.4 609.66,1155 680,1155 1062.19,1174.03 1508.17,1261.78 1508.17,1357.48 705.16,1410.25
  other v2: -62.24,-354.2 179.99,-354.2 422.23,-354.2 -169.56,751.44 1750,1280.9 254.73,1437.34
GND-e: BR2.2 C5.2 C6.2 C52.2 IC2.5 IC2.6 IC2.7 IC2.8 Q1.3 R61.1 | length 2762
  Top Layer w60: IC2.8 IC2.7 IC2.6 IC2.5 ; IC2.5@1350,-776.35 1350,-1080.61 1392.79,-1123.4 1438.4,-1123.4 C5.2
  Bottom Layer w40: Q1.3 736.97,-415.07 738.38,-416.48 R61.1 738.38,-526.42 786.42,-526.42 840,-580 840,-721.65 873.28,-754.94 934.94,-754.94 C6.2 1028.24,-760 1043.24,-775 IC2.8 IC2.7 IC2.6 IC2.5 1350,-849.82 1445,-944.82 ; BR2.2 1298.43,-1520.79 1275,-1497.36 1275,-1340 1305,-1310 1410,-1310 1445,-1275 C5.2 1445,-944.82 ; 1435.32,-944.82 1445,-944.82
INPUT: C11.2 D13.2 IC3.6 R25.1 R26.2 | length 619.7
  Bottom Layer w20: C11.2 D13.2@278.88,935.46 ; D13.2 278.88,934.86 D13.2@278.88,935.46 ; D13.2@282.88,935.46 D13.2@278.88,935.46 ; IC3.6 512.3,1118.09 454.11,1118.09 397.21,1175 311.78,1175 258.94,1122.16 R25.1 255,1034.73 R26.2 278.88,1010.85 D13.2@278.88,935.46
L: "Fuse 3A.1" K2.3 pad.4@1350,-2310
  other v2: 960,-1770 1130,-1770 960,-1590
LCD-DN: "NOKIA 1202-1.5" IC3.18 | length 1239.7
  Top Layer w15: 474.67,1351.36 474.67,1517.34 488.52,1531.19 519.67,1562.34 v1(524.47,1562.34)
  Bottom Layer w20: v1(524.47,1562.34) 524.47,1604.77 539.7,1620 790,1620 935,1475 965,1475 995,1445 995,1201.51 942.23,1148.74 IC3.18
LCD-RST: "NOKIA 1202-1.2" IC3.11 | length 1001.6
  Top Layer w15: 404.88,1351.36 404.88,1515.12 381.61,1538.39 381.61,1580.58 401.37,1600.34 704.66,1600.34 721.03,1583.97 v1(721.03,1498.86)
  Bottom Layer w20: IC3.11 632.76,1452.76 678.86,1498.86 v1(721.03,1498.86)
LCD-SCE: "NOKIA 1202-1.3" IC3.8 | length 626.2
  Top Layer w15: 428.14,1351.36 428.14,1544.4 v1(440,1556.26)
  Bottom Layer w20: v1(440,1556.26) 440,1517.13 486.97,1470.16 486.97,1189.19 495.93,1180.24 IC3.8
LCD-SCLK: "NOKIA 1202-1.6" IC3.10 | length 541
  Top Layer w15: 497.94,1351.36 497.94,1486.8 535.47,1524.34 586.62,1524.34 v1(590.53,1528.25)
  Bottom Layer w20: v1(590.53,1528.25) 601.26,1517.51 IC3.10
n: C4.2 l1.1 pad.4@530,-2310 pad.4@985,-2310 | length 3680.3
  Top Layer w45: C4.2 1.61,-1800 -24.75,-1773.64 -24.75,-1308.89 49.14,-1235 725,-1235 ; v2@727.5,-2205 727.5,-1237.5 725,-1235 ; v2(730,-2260) v2@730,-2258.65 ; v2@730,-2206.35 v2(730,-2205) ; l1.1 1650,-1820 1506.36,-1820 1480,-1793.64 1480,-1685 1030,-1235 725,-1235
  other v2: 730,-2430 730,-2370 730,-2317.28
NC: K2.2
NetBR2_1: BR2.1 RT1.2 | length 392.5
  Bottom Layer w40: RT1.2 1370.74,-1410.74 1446.57,-1410.74 1470,-1434.17 1470,-1595.78 1446.57,-1619.21 BR2.1
NetBR2_3: BR2.3 l1.2 RV1.1 | length 1067.7
  Top Layer w45: RV1.1 1710,-1610 l1.2
  Bottom Layer w45: RV1.1 1683.64,-1735 1710,-1708.64 1710,-1521.82 ; BR2.3 1708.97,-1520.79 1710,-1521.82 ; l1.2 1710,-1521.82
NetBR2_4: "Fuse 3A.2" BR2.4 C4.1 RV1.2 | length 2146.7
  Bottom Layer w45: C4.1@105,-1590 109.78,-1585.22 109.78,-1347.54 182.32,-1275 1095,-1275 1185,-1365 1185,-1578.01 1337.2,-1730.22 1370.22,-1730.22 RV1.2 1379.78,-1730.22 1466.9,-1730.22 1476.61,-1720.5 1484.49,-1720.5 1493.48,-1711.51 1493.48,-1686.52 1556.99,-1623.01 1600.3,-1623.01 BR2.4
NetBuzzer_2: BUZZER.2 IC5.3 | length 116.4
  Bottom Layer w27.56: IC5.3@41.04,-560 103.91,-560 133.91,-590 BUZZER.2
NetC1_2: C1.2 D7.1 D9.1 R8.1 R10.1 | length 399.7
  Bottom Layer w30: D9.1 D7.1 185,309.47 185,391.06 170,406.06 C1.2 ; R10.1 C1.2 ; R8.1 250.99,411.17 171.17,411.17 C1.2
NetC3_2: C3.2 R10.2 R11.1 | length 218.3
  Bottom Layer w30: R10.2 R11.1
NetC6_1: C6.1 IC2.2 | length 342.5
  Bottom Layer w40: C6.1 943.94,-649.76 955.43,-638.27 955.43,-634.33 992.61,-597.16 1126.57,-597.16 1150,-573.73 IC2.2
  other v1: 1150,-524.04
NetC10_2: C10.2 D1.1 R1.2 | length 602
  Top Layer w40: R1.2 1510,-497.92 1547.92,-460 C10.2
  Bottom Layer w40: R1.2 1514.78,-605.22 1514.78,-518.08 1574.76,-458.1 D1.1@1574.76,-446.29 ; D1.1 1568.08,-442.97 1649.86,-442.97 1666.88,-460 C10.2
NetC13_2: C13.2 C19.2 D5.1 IC6.3 | length 433.3
  Bottom Layer w30: D5.1 1321.29,486.29 1343.94,508.94 1441.03,508.94 1458.61,526.51 1458.61,529.32 1470.06,540.76 1488.03,540.76 1488.03,548.55 1499.47,560 C13.2
  other v1: 1555.55,560
NetC15_2: C15.2 P3.1 R9.1 | length 400.7
  Bottom Layer w27.87: P3.1@-30,1341.33 v1(18.27,1341.33) 52.6,1341.33 142.16,1430.89 142.16,1522.66 R9.1
NetC52_1: C52.1 IC2.1 Q1.4 R61.2 | length 1010.9
  Bottom Layer w40: R61.2@630,-525.67 630,-415.07 631.57,-413.49 631.57,-289.61 Q1.4 628.14,-279.32 628.14,-195.29 658.43,-165 813.54,-165 848.92,-200.38 848.92,-392.95 887.99,-432.02 945.63,-432.02 988.61,-475 IC2.1
  other v1: 989.96,-475
NetC61_1: C61.1 Q1.1 R6.2 | length 247.1
  Bottom Layer w25: R6.2 634.29,311.96 634.29,66.89 Q1.1
NetC61_2: C61.2 D4.1 Q1.2 | length 320.8
  Bottom Layer w27.87: Q1.2 737.67,66.89 737.67,191.63 C61.2 740.72,190 855.39,190 870.04,204.64 D4.1
NetD3_2: D3.2 K2.4 Q2.2 Q2.4 | length 755.6
  Bottom Layer w50: Q2.2 451.06,-1105 466.06,-1090 K2.4 485,-838.3 548.06,-775.24 D3.2
NetD7_2: D7.2 D8.1 L6.2 | length 476.8
  Bottom Layer w30: D8.1 D7.2 198.33,-0.25 299.79,-101.7 L6.2@380,-101.7
NetD9_2: D9.2 D10.1 L6.1 | length 536.1
  Bottom Layer w30: L6.1@-100,-90 -88.3,-101.7 51.88,-101.7 111.67,-41.92 D9.2 D10.1
NetIC5_1: IC5.1 R22.1 | length 80.3
  Bottom Layer w25: R22.1 -142.12,-597.62 -62.46,-597.62 IC5.1
"NetNOKIA 1202-1_11": "NOKIA 1202-1.11" R5.1 | length 431.5
  Top Layer w15: 614.26,1351.36 614.26,1487.33 652.51,1525.58 652.51,1539.35 v1(658.25,1545.09)
  Bottom Layer w20: v1(658.25,1545.09) 663.03,1549.88 709.79,1549.88 714.92,1555 754.56,1555 792.57,1516.99 R5.1
NetQ2_1: Q2.1 R13.2 | length 122.6
  Bottom Layer w25: R13.2 97.75,-924.02 97.75,-1045.59 Q2.1
OD: D1.2 IC2.4 TR1.1 | length 539.1
  Top Layer w40: IC2.4 1350,-369.13 1380.04,-339.09 1411.31,-339.09 TR1.1
  Bottom Layer w40: IC2.4 1354.78,-470.22 1354.78,-452.54 1360.5,-446.83 1360.5,-385.12 1415.62,-330 1425.09,-330 1470.21,-284.87 D1.2@1574.76,-284.87
"OUT TRANS": D2.2 TR1.7 | length 140.9
  Bottom Layer w40: D2.2 1321.44,250.24 1336.88,234.81 TR1.7@1336.88,117.01
  other v1: 1299.39,160.81 1376.1,160.81
"POWER VOLTAGE": IC3.9 | length 92.2
  Bottom Layer w20: IC3.9 569.76,1329.03
"relay main": IC3.28 R13.1 | length 2443.8
  Top Layer w20: v2(135.14,-823.67) 140.88,-817.93 159.27,-817.93 293.94,-683.25 293.94,-418.56 451.41,-261.09 451.41,61.41 522.12,132.12 592.21,132.12 603.92,143.83 603.92,543.54 674.62,614.23 674.62,714.62 692.64,732.64 743.93,732.64 v1(796.57,680)
  Bottom Layer w20: R13.1 -7.6,-918.43 -7.6,-876.27 45,-823.67 v2(135.14,-823.67) ; IC3.28 695.75,780.82 v1(796.57,680)
RESET: C28.2 IC3.4 P1.5 R3.1 | length 1672.8
  Top Layer w20: v1(365,1020) 320,1065 320,1570 380,1630 870,1630 P1.5@945,1555
  Bottom Layer w20: C28.2@379.01,938.92 365,952.94 v1(365,1020) 399.25,1054.25 IC3.4 ; P1.5@948.96,1560.09 981.72,1527.34 982.16,1527.34 R3.1
SCL: IC3.19 R23.1 U1.6 | length 746.8
  Bottom Layer w20: IC3.19 1082.12,1117.24 1139.73,1174.86 1139.73,1282.41 1151.45,1294.13 1248.79,1294.13 1302.72,1240.2 R23.1 1310.59,1240.2 1332.09,1261.69 1332.09,1265.63 1347.36,1280.9 U1.6 U1.6@1415.9,1280.9
SDA: IC3.20 R24.1 U1.5 | length 746.4
  Bottom Layer w20: IC3.20 1110.75,1085.75 1185.96,1160.96 1197.57,1160.96 ; R24.1 1197.57,1160.96 ; U1.5@1433.99,1230.9 U1.5 1411.09,1230.9 1411.09,1196.89 1375.15,1160.96 1197.57,1160.96
Sens: C12.2 P3.2 R25.2 | length 301
  Bottom Layer w23.62: P3.2@-40,1243.22 -38.22,1245 30.78,1245 43.39,1232.4 R25.2
  other v1: 25,1245
sw1: IC3.30 R43.1 ST3.2 | length 1605.5
  Top Layer w20: ST3.2@306.44,0 1.44,0 -15,0 1.44,16.44 1.44,126.72 549.72,675 v1(605,675)
  Bottom Layer w20: R43.1 620,615.61 605,630.61 v1(605,675) 632.76,702.76 IC3.30
SW2: IC3.29 R2.1 ST4.2 | length 1948.8
  Top Layer w19.68: 516.18,41.18 549.61,74.61 708.47,74.61 720,86.14 v1(720,665)
  Top Layer w20: 516.18,41.18 516.18,-280.52 610.35,-374.69 631.12,-374.69 646.87,-358.94 646.87,-374.69 ST4.2@646.87,-679.69
  Bottom Layer w20: IC3.29 664.25,722.8 720,667.06 v1(720,665) 720,624.18 R2.1
sw3: IC3.26 R7.1 ST1.2 | length 1657.7
  Top Layer w19.68: v1(955,680) 955,542.8 856.29,444.09 856.29,171.01 1027.31,0 ST1.2@1161.95,0
  Top Layer w25: ST1.2@1161.95,0 ST1.2@1466.95,0
  Bottom Layer w20: IC3.26 758.74,810.14 788.06,780.82 854.18,780.82 v1(955,680) 955,625.69 R7.1
SW4: IC3.27 R4.1 ST2.2 | length 1429.5
  Top Layer w19.68: 752.85,0 781.36,0 781.36,488.95 868.26,575.85 868.26,673.26 v1(870,675)
  Top Layer w20: ST2.2@580.98,0 752.85,0 781.36,0 870.23,0 ST2.2@885.98,0
  Bottom Layer w20: IC3.27 727.24,796.86 787.44,736.67 824.03,736.67 870,690.7 v1(870,675) 870,619.25 R4.1
TCK: IC3.24 P1.4 | length 739.9
  Top Layer w20: v1(945,955) 945,1355 1048.96,1458.96 P1.4@1048.96,1560.09
  Bottom Layer w20: IC3.24 926.21,959.76 v1@935,950.98
TMS: IC3.23 P1.3 | length 767.3
  Top Layer w20: v1(999.96,1020) 999.96,1026.52 1017.66,1044.22 1017.66,1212.75 1150,1345.1 P1.3@1150,1560.09
  Bottom Layer w20: IC3.23 922.95,991.26 951.69,1020 v1(999.96,1020)
VCC-3.3v: "NOKIA 1202-1.7" "NOKIA 1202-1.8" C8.1 C9.1 C16.2 C29.2 C30.2 C31.2 D11.1 D13.1 IC1.2 IC1.4 IC3.1 IC3.5 IC3.17 P1.2 R2.2 R3.2 R4.2 R7.2 R23.2 R24.2 R43.2 U1.8 | length 6180.1
  Top Layer w15: 521.2,1351.36 521.2,1159.06 544.43,1135.83 ; 544.45,1351.35 544.45,1135.83 ; v1(609.66,1088.42) 603.92,1094.16 586.12,1094.16 544.45,1135.83
  Top Layer w31.5: 1141.84,1022.65 1215.91,1096.72 1215.91,1480.91 1245,1510 P1.2
  Top Layer w40: 850,1079.06 850,933.98 923.98,860 979.19,860 1060,940.81
  Top Layer w60: v1@623.98,1087.72 736.85,1087.72 763.34,1114.21 814.85,1114.21 850,1079.06 ; 1057.49,937.51 1142.23,1022.26 1346.48,1022.26 1353.68,1015.06 v1(1557.93,1015.06) 1565.13,1022.26 C31.2@1618.54,1022.26
  Bottom Layer w20: C8.1@362.66,1122.16 399.08,1085.75 IC3.5 v1@607,1085.75 ; C9.1 489.34,849.49 445,893.82 445,940.98 463.79,959.76 IC3.1 564.34,959.76 576.05,971.48 576.05,1054.8 v1@607,1085.75 ; v1(609.66,1088.42) v1@607,1085.75 ; v1@609.98,1085.75 612.64,1088.42 730.78,1088.42 755.74,1113.37 v1(762.5,1113.37) 762.5,1120.13 787.81,1145.45 787.81,1156.01 810.36,1178.55 845.17,1178.55 IC3.17 905.41,1180.24 917.13,1191.95 917.13,1291.79 C29.2
  Bottom Layer w23.62: D13.1@283.26,788.74 320.36,788.74 375,734.1 375,563.23 ; D11.1 321.81,563.23 375,563.23 ; C31.2 1615.43,1019.15 1562.02,1019.15 v1(1557.93,1015.06) 1552.15,1015.06 1538.94,1001.86 1472.94,1001.86 1453.25,982.17 1453.25,969.51 1400.67,916.93 1400.67,910.04 1393.78,903.15 IC1.4 1123.11,823.97 1065.32,766.17 1065.32,540.31 1020.04,495.04 R7.2 R4.2 R2.2 R43.2 422.23,495.04 375,542.27 375,563.23
  Bottom Layer w27.56: C30.2@1095.01,1351.43 1096.01,1350.43 R24.2 ; P1.2 1245,1507.86 1182.4,1445.26 R3.2 1182.4,1365.61 R24.2 ; U1.8 1341.06,1380.9 1310.59,1350.43 R23.2 1239.09,1350.43 R24.2
VCC-310V: C2.1 C5.1 C10.1 R1.1 RT1.1 TR1.4 | length 5544.9
  Top Layer w40: TR1.4 1226.57,-332.39 1250,-355.82 1250,-582.16 1360.03,-692.19 1685,-692.19 1710,-667.19 ; RT1.1 1575.43,-1404.57 1575.43,-1340 1575.43,-1199.57 C5.1 1645,-1040 1740,-945 1740,-697.19 1710,-667.19 ; C2.1 C10.1 1675,-327.5 1760,-412.5 1760,-500 1710,-550 R1.1 1710,-667.19
  Bottom Layer w30: 1755,-575 1755,-314.35
  Bottom Layer w40: TR1.4@940,-330 1139.53,-330 ; RT1.1 v1(1575,-1340) 1575,-1200 C5.1 1730,-1045 1730,-636.75 1710,-616.75 R1.1 1705.22,-614.78 1681.98,-614.78 1591.75,-705 1475.25,-705 1420.01,-649.76 1324.76,-649.76 1250,-575 1250,-353.43 1226.57,-330 1139.53,-330 ; C10.1@1673.82,-240 C2.1@1673.82,-130 ; C2.1 1666.88,-128.82 1640.7,-155 1314.53,-155 1139.53,-330 ; C10.1@1695,-250 1695,-254.35 1755,-314.35 ; R1.1@1732.48,-597.52 1755,-575
VCC_5V: C14.2 C17.2 IC1.3 IC6.2 IC6.4 R9.2 | length 3150.4
  Bottom Layer w20: 332.34,1622.34 362.59,1652.59 1392.02,1652.59 1445,1599.62
  Bottom Layer w30: R9.2 332.34,1622.34 ; IC6.4 1306.55,599.1 ; IC6.2 1306.55,599.1 ; 1445,1599.62 1445,1487.57 1489.62,1442.95 1682.43,1442.95 1700,1425.38 1700,812.99 1680.49,793.48 1634.76,793.48 1611.75,770.47 1599.79,770.47 1594.18,764.86 v1(1555.55,764.86) 1466.54,764.86 1458.78,772.62 1420.67,772.62 1397.48,795.81 1397.48,809.29 1393.78,812.99 1387.19,812.99 1386.85,812.65 1339.3,812.65 1306.55,779.9 1306.55,599.1 ; C17.2@1466.04,773.77 C17.2
VDD: BUZZER.1 C18.2 C24.2 D2.1 D3.1 D5.2 K2.5 R6.1 | length 3512.4
  Top Layer w50: BUZZER.1 446.18,-814.34 485.69,-853.85 658.85,-853.85 K2.5
  Bottom Layer w50: C18.2@552.52,409.96 705.61,409.96 743.82,371.74 R6.1@743.82,316.6 ; C18.2 546.02,407.17 546.02,379.29 495,328.27 v1(495,274.14) C24.2 499.53,215.47 499.53,-536.65 BUZZER.1 506.18,-650 665.32,-650 721.29,-705.98 721.29,-763.43 709.48,-775.24 D3.1 721.29,-916.29 K2.5 ; 737.33,394.76 1139.96,394.76 1159.87,374.85 1159.87,348.27 ; R6.1 R6.1@743.82,316.6 ; R6.1@750.32,323.1 R6.1@743.82,316.6 ; D2.1 1159.87,251.4 1159.87,348.27 ; D5.2 1159.87,348.27
pads on no net: IC3.2 IC3.3 IC3.12 IC3.13 IC3.14 IC3.21 IC3.22
copper on no net: | length 541.2
  Bottom Layer w20: 438.9,1022.76 513.15,1022.76 ; 441.63,991.26 513.15,991.26 ; 664.25,1236.85 664.25,1326.5 ; 695.75,1236.85 695.75,1327.73 ; 727.24,1236.85 727.24,1326.5 ; 846.85,1022.76 909.46,1022.76 ; 846.85,1054.25 909.46,1054.25

## Polygon pours and split planes (outlines as drawn)
NetC10_2 on Bottom Layer "NETC10_2_L02_P009" (solid, remove dead copper, pour order 9): 1550.04,-649.76 1553.86,-645.95 1553.86,-535 1676.01,-535 1724.7,-486.31 1724.7,-414.7 1690,-380 1527.75,-380 1455.19,-452.57 1455.19,-612.46 1492.73,-650
OD on Bottom Layer "OD_L02_P010" (solid, remove dead copper, pour order 10): 1415.62,-418.07 1422.94,-418.07 1487.58,-353.43 1614.93,-353.43 1614.93,-224.5 1590.43,-200 1399.45,-200 1305.5,-293.95 1305.5,-524.71 1327.28,-546.49 1404.12,-546.49 1415.62,-535
GND-e on Bottom Layer "GND-E_L02_P011" (solid, remove dead copper, pour order 11): 1505,-1310 1505,-918.48 1404.12,-817.6 1404.12,-758.23 1353.5,-707.6 880.3,-707.6 869.99,-697.29 869.99,-510.4 787.71,-428.12 787.71,-222.26 699.57,-222.26 692.76,-229.07 692.76,-570.57 753.42,-631.23 787.71,-631.23 787.71,-715.76 945.18,-873.23 1115.24,-873.23 1115.24,-1150.24 1240,-1275 1240,-1518.74 1290,-1568.74 1410,-1568.74 1410,-1487.11 1401.62,-1478.73 1310.4,-1478.73 1305.5,-1473.83 1305.5,-1355 1308.9,-1355 1328.9,-1335 1495,-1335 1505,-1325
NetC6_1 on Bottom Layer "NETC6_1_L02_P012" (solid, remove dead copper, pour order 12): 895,-684.94 1167.56,-684.94 1200,-652.5 1200,-420.99 1189.07,-410.07 1121.42,-410.07 1107.5,-423.99 1107.5,-512.3 1083.14,-536.65 925.73,-536.65 890,-572.39 890,-679.94
VCC-310V on Bottom Layer "VCC-310V_L02_P013" (solid, remove dead copper, pour order 13): 919.49,-376.65 1266.4,-376.65 1266.4,-289.87 1381.28,-175 1628.99,-175 1638.99,-185 1638.99,-322.83 1677.71,-361.56 1778.58,-361.56 1778.58,-118.58 1750,-90 1052.39,-90 898.23,-244.16 898.23,-355.4
VCC-310V on Bottom Layer "VCC-310V_L02_P014" (solid, remove dead copper, pour order 14): 1550.04,-1200 1773.34,-1200 1790,-1183.34 1778.58,-1171.92 1778.58,-361.56 1728.15,-361.56 1750,-383.41 1750,-504.87 1683.77,-571.1 1611.57,-571.1 1569.76,-612.91 1569.76,-645.44 1546.48,-668.72 1481.5,-668.72 1387.78,-575 1308.02,-575 1284.01,-550.99 1284.01,-267.37 1243.86,-267.37 1222.12,-289.11 1222.12,-650.65 1256.41,-684.94 1387.76,-684.94 1445,-742.18 1445,-814.6 1447.17,-814.6 1548.86,-916.29 1548.86,-1200
NetC52_1 on Bottom Layer "NETC52_1_L02_P015" (solid, remove dead copper, pour order 15): 665.32,-212.75 682.78,-195.29 805.33,-195.29 824.03,-213.99 825.77,-212.25 898.23,-212.25 898.23,-104.26 883.98,-90 594.48,-90 560,-124.48 560,-583.92 576.98,-600.9 658.05,-600.9 665.32,-593.63
NetC52_1 on Bottom Layer "NETC52_1_L02_P016" (solid, remove dead copper, pour order 16): 1089.6,-426.44 1073.23,-410.07 911.93,-410.07 883.98,-382.11 883.98,-173.82 876.29,-166.14 806.47,-166.14 805.33,-165 805.33,-409.76 913.65,-518.08 1076.39,-518.08 1089.6,-504.87
GND on Bottom Layer "GND_L02_P008" (solid, remove dead copper, pour order 8): 1800,1720 -235,1720 -235,-1225 1005,-1225 1005,-930 890,-930 515,-555 515,-65 1800,-65
OD on Top Layer "OD_L01_P017" (solid, remove dead copper, pour order 17): 1428.82,-409.76 1489.09,-349.5 1489.09,-285 1483.18,-279.09 1345.91,-279.09 1300,-325 1300,-503.34 1335.99,-539.33 1414.17,-539.33 1428.82,-524.69
NetC10_2 on Top Layer "NETC10_2_L01_P018" (solid, remove dead copper, pour order 18): 1566.62,-638.38 1566.62,-526.31 1583.92,-509.01 1692.4,-509.01 1716.86,-484.55 1716.86,-432.09 1694.53,-409.76 1507.28,-409.76 1458.96,-458.08 1458.96,-636.33 1477.63,-655 1550,-655
VCC-310V on Top Layer "VCC-310V_L01_P019" (solid, remove dead copper, pour order 19): 1575.43,-327.51 1637.92,-390 1778.58,-390 1778.58,-78.58 1765,-65 1602.82,-65 1575.43,-92.39 1575.43,-115
VCC-310V on Top Layer "VCC-310V_L01_P020" (solid, remove dead copper, pour order 20): 893.03,-291.93 893.03,-366.15 927.41,-400.54 1196.86,-400.54 1216.32,-420 1216.32,-656.32 1275,-715 1438.4,-715 1438.4,-610.39 1398.42,-570.41 1300,-570.41 1275,-545.41 1275,-314.09 1238.54,-277.63 902.26,-277.63 895,-284.89
VCC-310V on Top Layer "VCC-310V_L01_P021" (solid, remove dead copper, pour order 21): 1547.92,-679.69 1589.13,-679.69 1589.13,-550 1600.82,-538.31 1600.82,-538.16 1697.31,-538.16 1714.14,-521.34 1778.58,-521.34 1778.58,-1256.42 1760,-1275 1650,-1275 1630,-1295 1630,-1462.5 1615,-1477.5 1527.47,-1477.5 1489.09,-1439.12 1489.09,-1211.37 1550,-1150.46 1550,-988.99 1438.4,-877.39 1438.4,-694.24 1436.34,-692.19 1589.13,-692.19
GND-e on Top Layer "GND-E_L01_P022" (solid, remove dead copper, pour order 22): 1512.74,-1045.71 1399.67,-932.65 1399.67,-757.47 1377.78,-735.58 1244.67,-735.58 1181.79,-672.69 972.84,-672.69 951.29,-694.24 953.26,-696.21 953.26,-857.05 985.08,-888.88 1098.88,-888.88 1150,-940 1150,-1160.57 1226.93,-1237.5 1421.02,-1237.5 1512.74,-1147.8
NetBR2_3 on Top Layer "NETBR2_3_L01_P023" (solid, remove dead copper, pour order 23): 1657.63,-1310 1657.63,-1510 1538.99,-1628.64 1538.99,-1753.99 1555,-1770 1733.58,-1770 1778.58,-1725 1778.58,-1304.29 1769.29,-1295 1672.63,-1295
GND on Top Layer "GND_L01_P006" (solid, remove dead copper, pour order 6): 1800,1720 -235,1720 -235,-1170 1075,-1170 1075,-940 1050,-915 852.59,-915 860,-250 1535,-250 1535,-40 1800,-40

## Keep-outs
Keep-Out Layer:
  lines w7.87: 1480,-2489.41 1480,-2156.29 1797.89,-2156.29 1797.89,1720 1529.93,1720 41.15,1720 -235,1720 -235,-2156.29 -14.09,-2156.29 -14.09,-2489.41 1480,-2489.41 ; 1480,-2489.41 1480,-2489.41

## Other copper
Top Layer:
  rectangle net GND: 569.76,1200.47 590.99,1468.86
  rectangle net GND: 637.2,1200.47 672.72,1486.36
  rectangle net GND: 350.53,1211.36 382.99,1501.1
  rectangle net "OUT TRANS": 1265,65.69 1418.01,188.37
  rectangle net GND: -215,-960 0,-597.16
  rectangle net GND: -215.69,275 -10.48,595
  rectangle net GND: 1380,240 1735,495
  rectangle net GND: 1420,1405 1710,1690
  rectangle net GND: -215.69,1435 45,1700.69
  rectangle net NetC13_2: 1494.94,514.1 1693.08,599.1
  rectangle net VCC_5V: 1495.72,722.8 1715.4,830.16
  rectangle net NetC15_2: -107.48,1307.86 50.22,1405
  rectangle net Sens: -107.48,1192.32 50.22,1289.46
  rectangle net NetC52_1: 962.07,-520.29 1083.06,-435
  rectangle net NetC6_1: 1106.98,-550 1188.99,-436.23
  rectangle net NetBR2_4: 49.14,-1650 159.7,-1540
  rectangle net NetBR2_4: 1330,-1775 1415,-1680